# Altium PCB RUH30H51M.pcbdoc
Units mm, origin at the board's own origin, x right, y up, seen from the top; angles counter-clockwise.
Board outline 18.1 x 19.89 mm, 2 copper layers (Top Layer, Bottom Layer); 1 components, 0 nets, 7 pads, 0 vias.
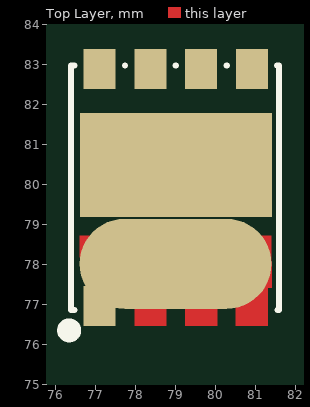
[diagram p0: Top Layer view]
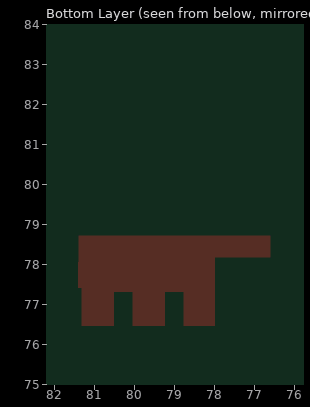
[diagram p1: Bottom Layer view, seen from below]

## Layer stack, top to bottom
Top Layer: signal copper (thickness not stored)
Dielectric: dielectric 0.32, FR-4, Dk 4.8
Bottom Layer: signal copper (thickness not stored)

## Board outline
87.945,69.85 69.85,69.85 69.85,89.735 87.945,89.735

## Components (designator, comment, footprint, x,y, rotation, side; value= is the part's Value field where it differs from the comment)
? "DFN-8_L6.0-W5.0-P1.27_AON6938" DFN-8_L6.0-W5.0-P1.27_AON6938 79.015,79.925 r0 top

## Footprints (in the part's own frame and the unit in brackets; to place one, negate y for a bottom-side part, rotate by r counter-clockwise, add the part's x,y. Pads: shape width x height; smd on the part's side, far side on the other; paste and mask are expansions set on the pad)
DFN-8_L6.0-W5.0-P1.27_AON6938 [mm]
  rect 0.8x1 smd: 1(-1.905,-2.96) 3(1.905,2.96) 4(0.635,2.96) 5(-0.635,2.96) 6(-1.905,2.96)
  oval 4.8x2.25 smd: 2(-0.005,-1.91)
  rect 4.8x2.6 smd: 7(0,0.56)
  Top Layer region: 2.39,-1.21 -2.405,-1.21 -2.405,-1.745 -1.02,-1.745 -1.02,-3.46 -0.235,-3.46 -0.235,-2.61 0.235,-2.61 0.235,-3.46 1.035,-3.46 1.035,-2.61 1.505,-2.61 1.505,-3.46 2.305,-3.46 2.305,-2.51 2.395,-2.51
  silkscreen extent -2.81,-3.72 2.58,3.05

## Nets (pads, with @x,y where several pads share a name; then routed paths per layer and width w, separated by ;. In a path a pad name is that pad's centre, name@x,y a point inside that pad or via, vN(x,y) a via of type N, cw(c..) or ccw(c..) an arc to the next point about the centre after c; other vN are vias at no path point)
pads on no net: ?.1 ?.2 ?.3 ?.4 ?.5 ?.6 ?.7